# Altium PCB ДФТВ.434519.003.101.PcbDoc (part 2 of 3)
Units mm, origin at the board's own origin, x right, y up, seen from the top; angles counter-clockwise.
Board outline 82.5 x 70 mm, 2 copper layers (Top Layer, Bottom Layer), stack 1.491 mm thick; 90 components, 67 nets, 446 pads, 341 vias.
Unrouted connection lines stored in the file: 55.
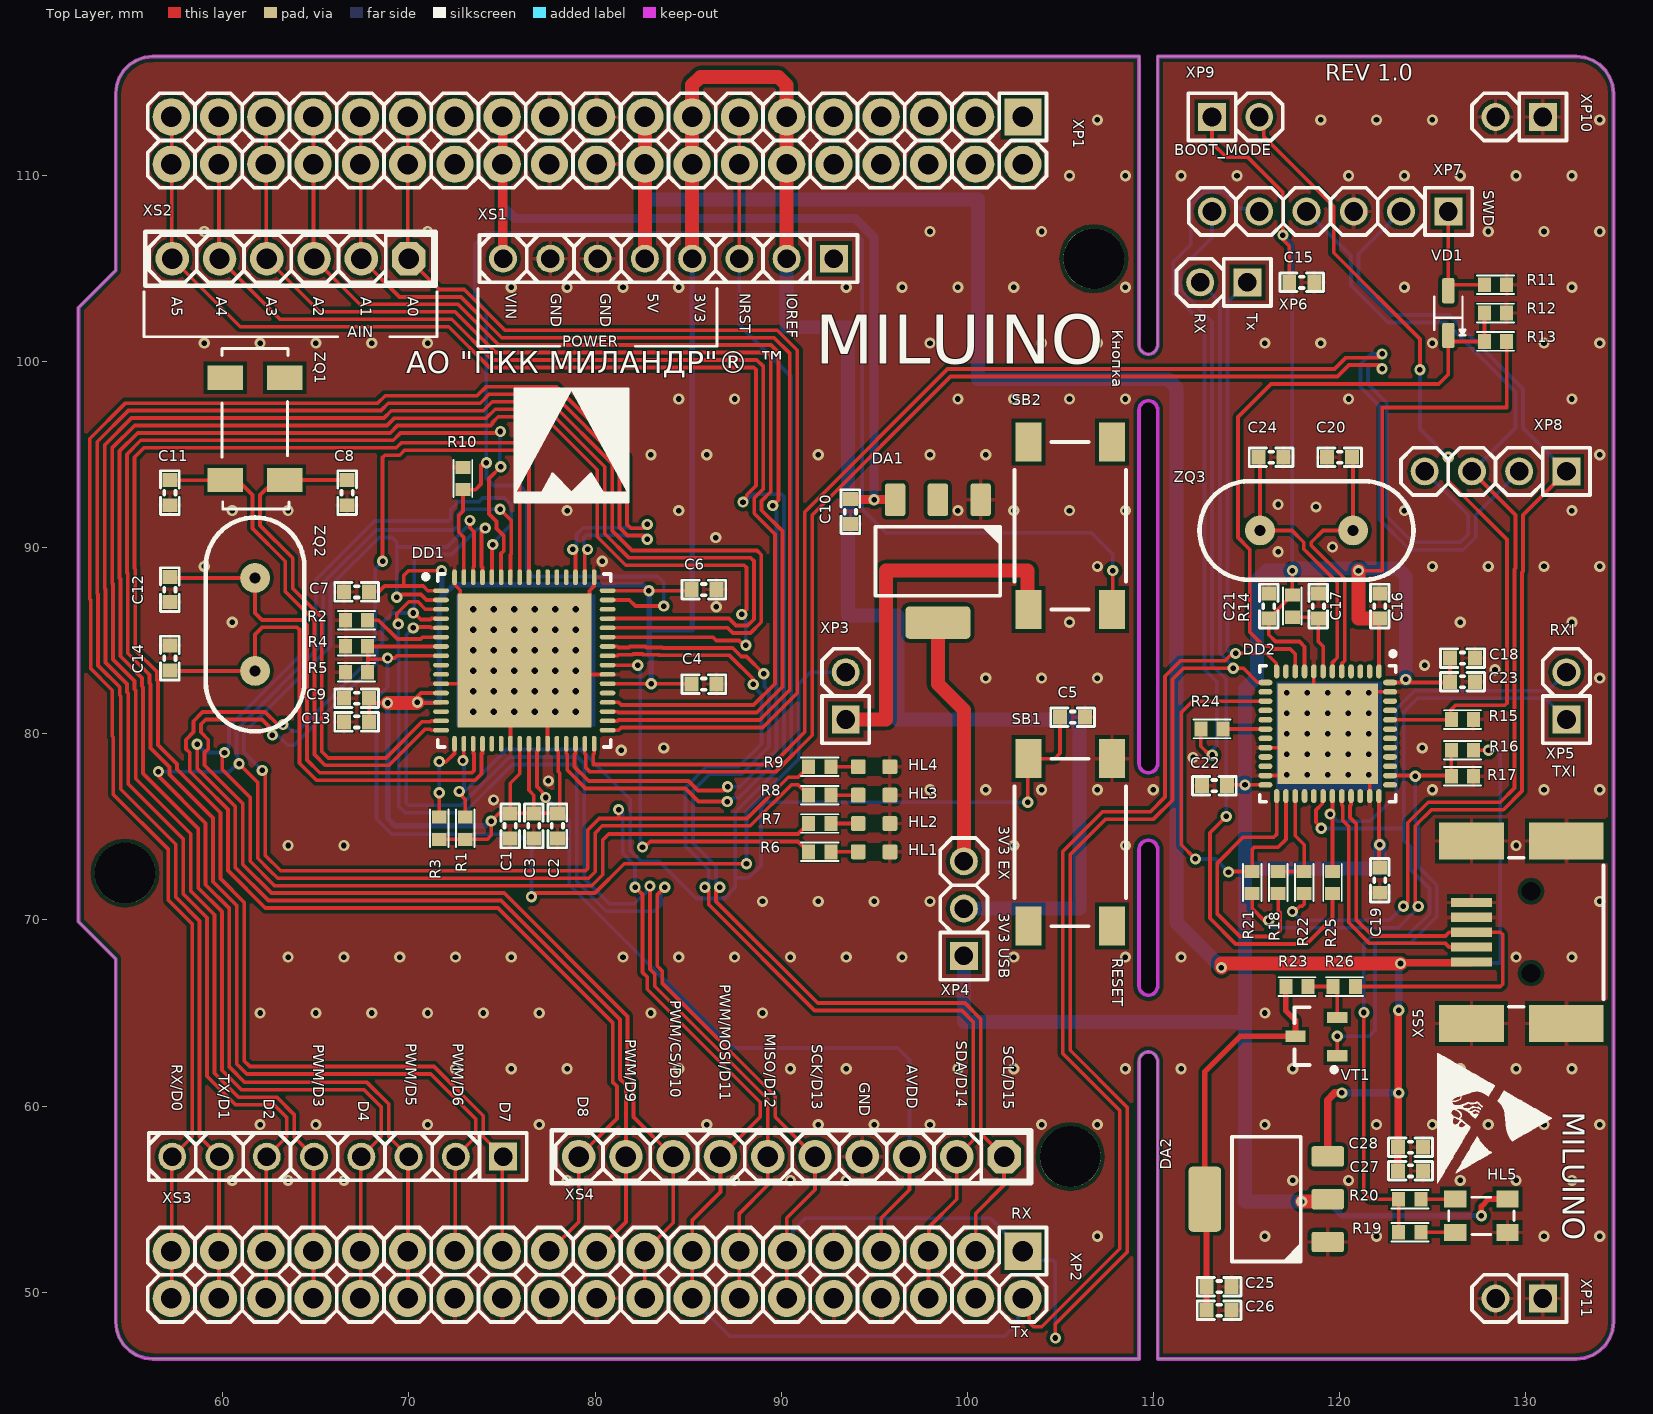
[diagram p0: Top Layer view]

## Via types
v1: diameter 0.6, hole 0.3, Top Layer to Bottom Layer, tented both sides, 280 vias
v2: diameter 0.8, hole 0.35, Top Layer to Bottom Layer, tented bottom, 36 vias
v3: diameter 0.66, hole 0.3, Top Layer to Bottom Layer, tented both sides, 25 vias

## Nets (pads, with @x,y where several pads share a name; then routed paths per layer and width w, separated by ;. In a path a pad name is that pad's centre, name@x,y a point inside that pad or via, vN(x,y) a via of type N, cw(c..) or ccw(c..) an arc to the next point about the centre after c; other vN are vias at no path point) (continued)
GND: C1.1 C2.1 C3.1 C4.1 C5.2 C6.1 C7.1 C8.1 C9.1 C10.1 C11.1 C12.1 C13.1 C14.1 C15.1 C16.1 C17.1 C18.1 C19.1 C20.1 C21.1 C22.1 C23.1 C24.1 C25.1 C26.1 C27.1 C28.1 DA1.1 DA2.1 HL1.K HL2.K HL3.K HL4.K HL5.1 R2.1 R4.1 R5.1 R10.1 R11.2 R12.2 R15.2 R17.2 SB1.1 XP1.19 XP1.20 XP1.21 XP1.22 XP2.8 XP2.9 XP2.10 XP2.20 XP2.22 XP2.24 XP2.26 XP7.3 XP10. XP10.1 XP11.1 XP11.2 XS1.6 XS1.7 XS4.4 XS5.0 XS5.4 XS5.5 | length 13.5
  Top Layer w0.2: 71.725,82.697 72.876,82.697 ; 72.45,88.422 72.46,88.412 72.46,88.011 72.75,87.721 72.75,87.397 72.955,87.192 ; 75.45,79.472 75.45,80.526 ; 77.45,79.472 77.45,80.623 ; 79.301,87.302 79.551,87.302 79.696,87.447 79.696,87.697 79.94,87.941 79.94,88.412 79.95,88.422 ; 79.621,83.197 80.675,83.197 ; 116.03,77.76 117.13,77.76 117.18,77.81 ; 116.03,79.26 116.83,79.26 117.18,78.91 ; 118.28,82.21 118.63,82.56 118.63,83.36 ; 121.58,77.81 121.63,77.76 121.63,76.66 ; 121.58,82.21 121.63,82.26 122.73,82.26
  other v1: 107,53 116,53 122,53 131,53 134,53 60.5,56 63.5,56 66.5,56 78.5,56 87.5,56 90.5,56 93.5,56 117.5,56 120.5,56 126.5,56 129.5,56 132.5,56 62,59 65,59 71,59 77,59 86,59 92,59 95,59 98,59 104,59 107,59 116,59 122,59 125,59 128,59 131,59 134,59 72.5,62 75.5,62 78.5,62 84.5,62 90.5,62 93.5,62 99.5,62 102.5,62 108.5,62 111.5,62 117.5,62 126.5,62 129.5,62 132.5,62 62,65 65,65 68,65 71,65 74,65 77,65 83,65 89,65 116,65 63.5,68 66.5,68 69.5,68 72.5,68 75.5,68 81.5,68 84.5,68 87.5,68 90.5,68 93.5,68 96.5,68 102.5,68 108.5,68 111.5,68 129.5,68 132.5,68 89,71 92,71 95,71 98,71 134,71 63.5,74 66.5,74 102.5,74 108.5,74 129.5,74 74.549,76.454 98,77 101,77 104,77 107,77 110,77 125,77 131,77 134,77 77.494,77.473 112.141,78.74 81.407,79.121 83.693,79.248 124.46,79.248 101,83 104,83 107,83 134,83 128.368,83.444 124.587,83.693 60.5,86 105.5,86 126.5,86 132.5,86 86.514,86.833 59,89 107,89 125,89 128,89 131,89 134,89 80.391,89.281 116.713,89.789 119.634,90.043 86.487,90.551 60.5,92 63.5,92 78.5,92 84.5,92 99.5,92 102.5,92 105.5,92 108.5,92 123.5,92 132.5,92 118.745,92.202 116.713,92.329 83,95 86,95 92,95 98,95 101,95 134,95 81.5,98 84.5,98 87.5,98 99.5,98 102.5,98 105.5,98 108.5,98 120.5,98 132.5,98 59,101 62,101 65,101 68,101 71,101 98,101 104,101 107,101 116,101 119,101 125,101 131,101 134,101 75.5,104 78.5,104 81.5,104 84.5,104 93.5,104 96.5,104 99.5,104 102.5,104 108.5,104 123.5,104 132.5,104 59,107 71,107 98,107 104,107 128,107 131,107 134,107 105.5,110 108.5,110 111.5,110 114.5,110 120.5,110 123.5,110 126.5,110 129.5,110 132.5,110 107,113 119,113 122,113 125,113 134,113